# EAGLE board AND or NAND gate (EAGLE 5.11)
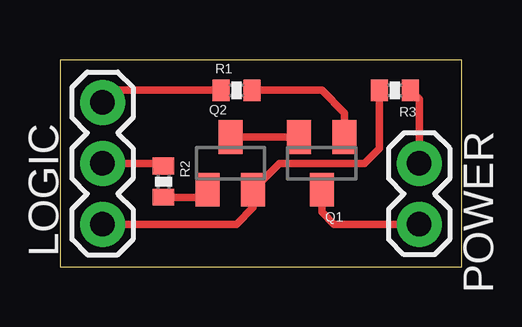
[diagram p0: board, top side]

Size 16.76 x 8.64 mm. Coordinates in mm from the lower left corner, seen from the top.
Outline: 0,0 16.76,0 16.76,8.64 0,8.64 0,0
Copper layers (1*16): Top 0.035mm / dielectric 1.5mm / Bottom 0.035mm
Design rules "PDX (Production)": minimum track width 6mil, minimum drill 13mil, track to track 6mil, track to pad 6mil, pad to pad 4mil, via to via 6mil, smd to smd 4mil, copper to edge 15mil, drill to drill 6mil, minimum pad ring 10mil, minimum via ring 8mil, stop-mask expansion 4mil, vias tented up to drill 25mil, thermal gap 10mil

## Footprints (pad centres in the part's own frame; a part is rotated, then mirrored left to right if it is on the bottom)
1X03 = drill 1.016 pad 1.88 round: 1 0,0; 2 2.54,0; 3 5.08,0
1X02 = drill 1.016 pad 1.88 round: 1 0,0; 2 2.54,0
SOT23 = smd 1 x 1.4: 1 -0.95,-1.1; 2 0.95,-1.1; 3 0,1.1
0402-RES = smd 0.7 x 0.9: 1 -0.65,0; 2 0.65,0

## Placement (x,y rotation side)
INFO4  Evan Teitelman and Warren D Greenway  [%CC-NC-SA]  0,-7.62 0 top  (outside the outline)
LOGIC  [1X03]  1.78,1.78 90 top
POWER  [1X02]  14.99,4.32 270 top
Q1  [SOT23]  10.92,4.32 180 top
Q2  [SOT23]  7.11,4.32 0 top
R1  10K  [0402-RES]  7.37,7.37 0 top
R2  10K  [0402-RES]  4.32,3.56 270 top
R3  4.7K  [0402-RES]  13.97,7.37 180 top

## Library data of the parts
INFO4 = PygmyBoards
LOGIC POWER Q1 Q2 R1-R3 = SparkFun

## Nets
GND: POWER.1 R3.1
IN-A: LOGIC.3 R1.1
IN-B: LOGIC.2 R2.1
N$1: Q1.2 Q2.3
N$3: Q1.1 R1.2
N$4: Q2.1 R2.2
OUT: LOGIC.1 Q2.2 R3.2
VCC: POWER.2 Q1.3

## Tracks (layer width: path | path; a pad name or v marks a point on that pad's centre or on a via)
GND
  Top 0.305: POWER.1 14.99,7 R3.1
IN-A
  Top 0.305: R1.1 2.29,7.37 LOGIC.3
IN-B
  Top 0.305: R2.1 4.21,4.32 LOGIC.2
N$1
  Top 0.305: Q2.3 Q1.2
N$3
  Top 0.305: R1.2 10.92,7.37 11.87,6.42 Q1.1
N$4
  Top 0.305: Q2.1 5.85,2.91 R2.2
OUT
  Top 0.305: LOGIC.1 7.37,1.78 8.06,2.47 Q2.2 9.16,4.32 12.7,4.32 13.32,4.94 R3.2
VCC
  Top 0.305: POWER.2 11.43,1.78 10.92,2.29 Q1.3

## Text on the board
_bsilk: AND | Out | In-B | Gnd | In-A | Vcc